# Altium PCB PCB1.PcbDoc (part 1 of 3)
Units mm, origin at the board's own origin, x right, y up, seen from the top; angles counter-clockwise.
Board outline 100.25 x 100.25 mm, 2 copper layers (Top Layer, Bottom Layer); 97 components, 80 nets, 311 pads, 309 vias.
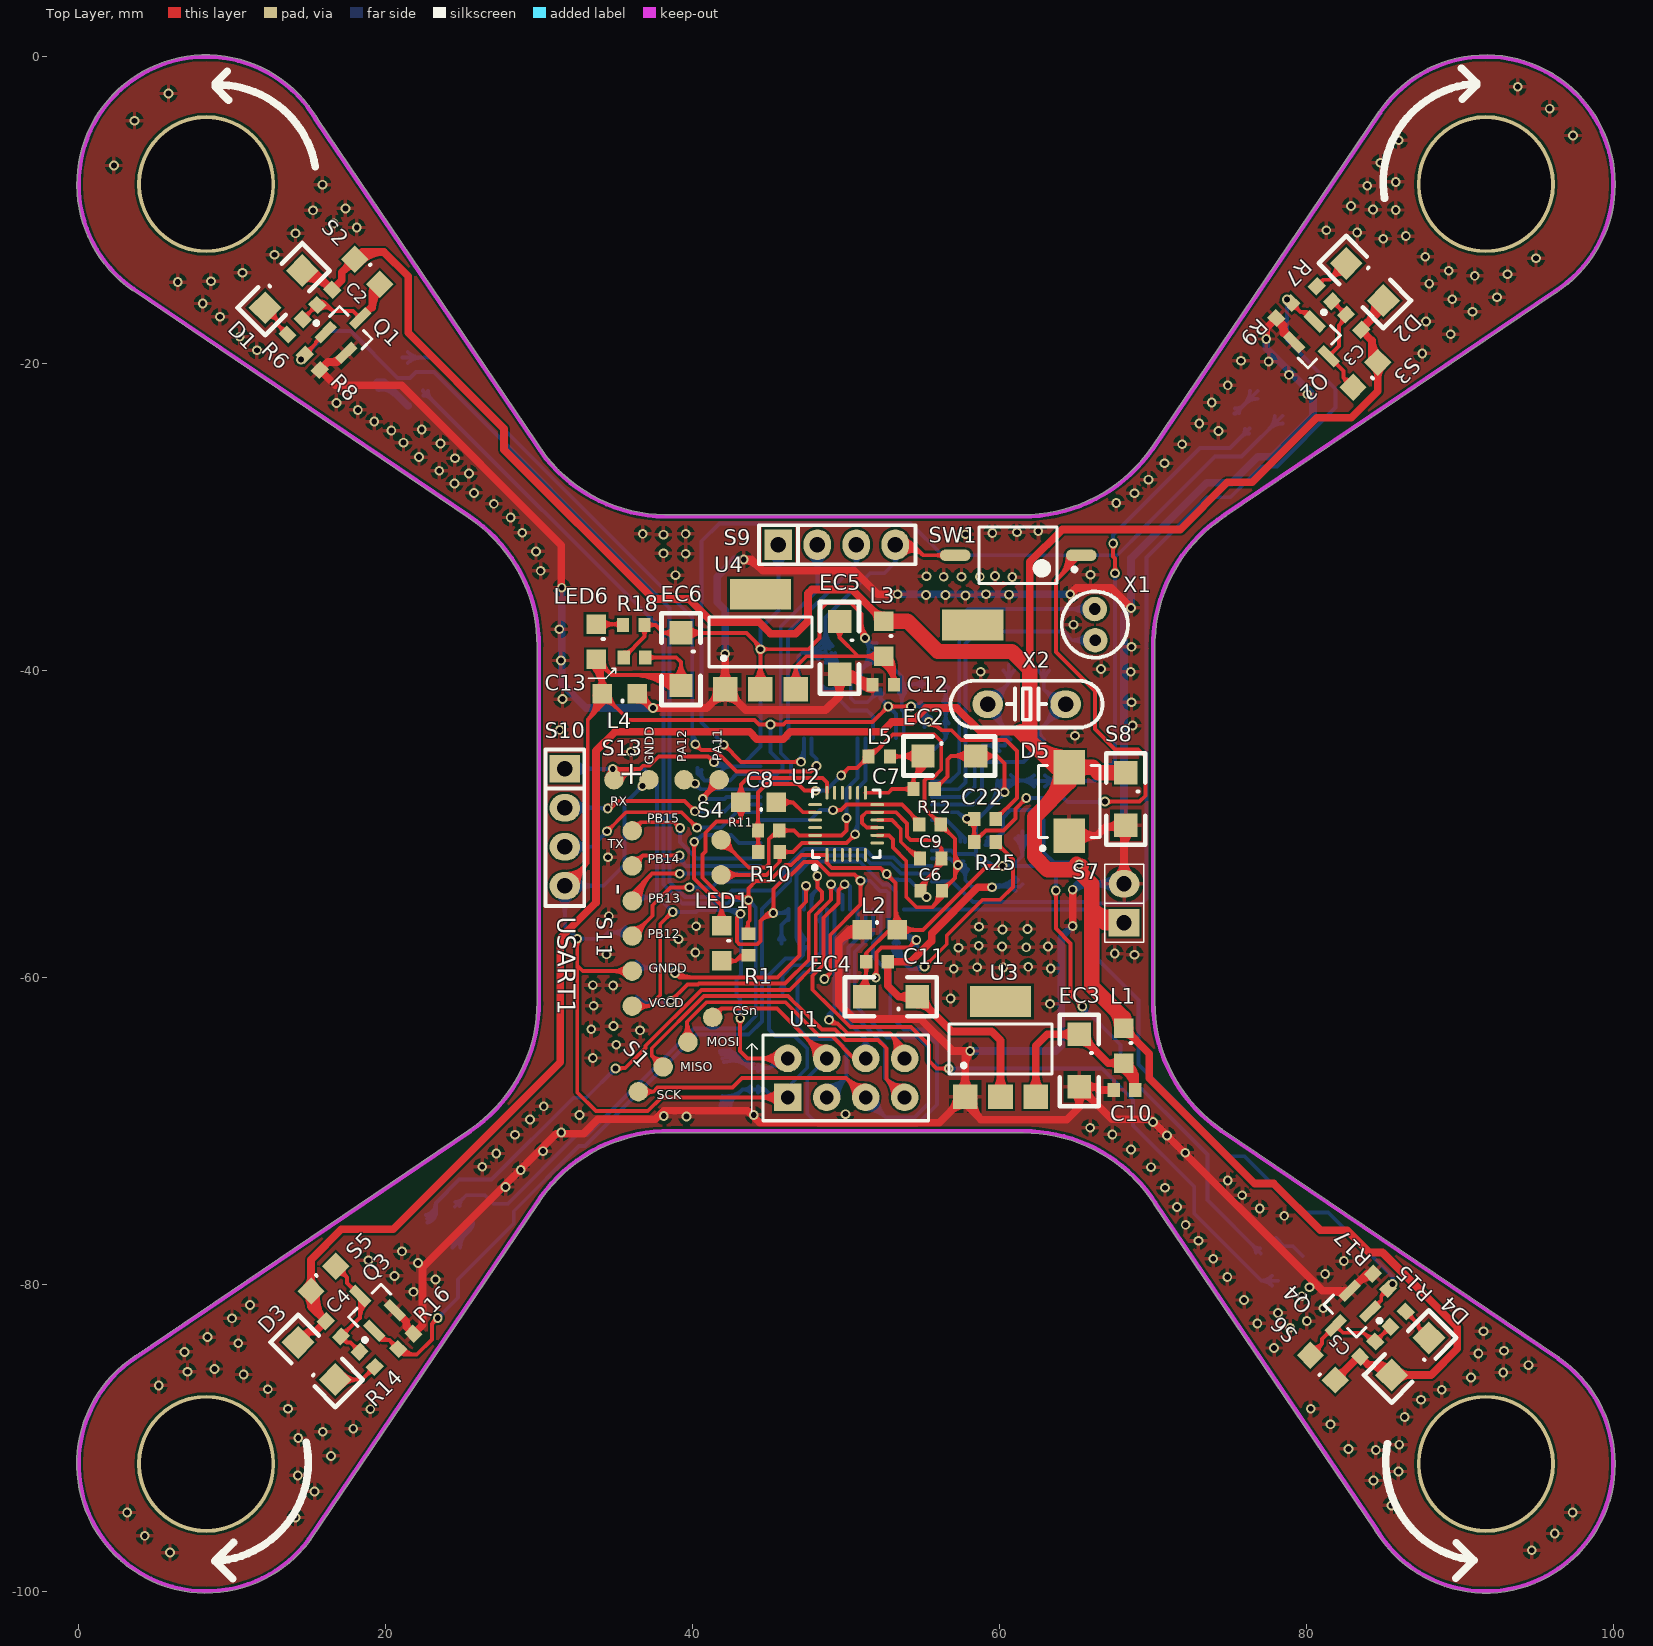
[diagram p0: Top Layer view]
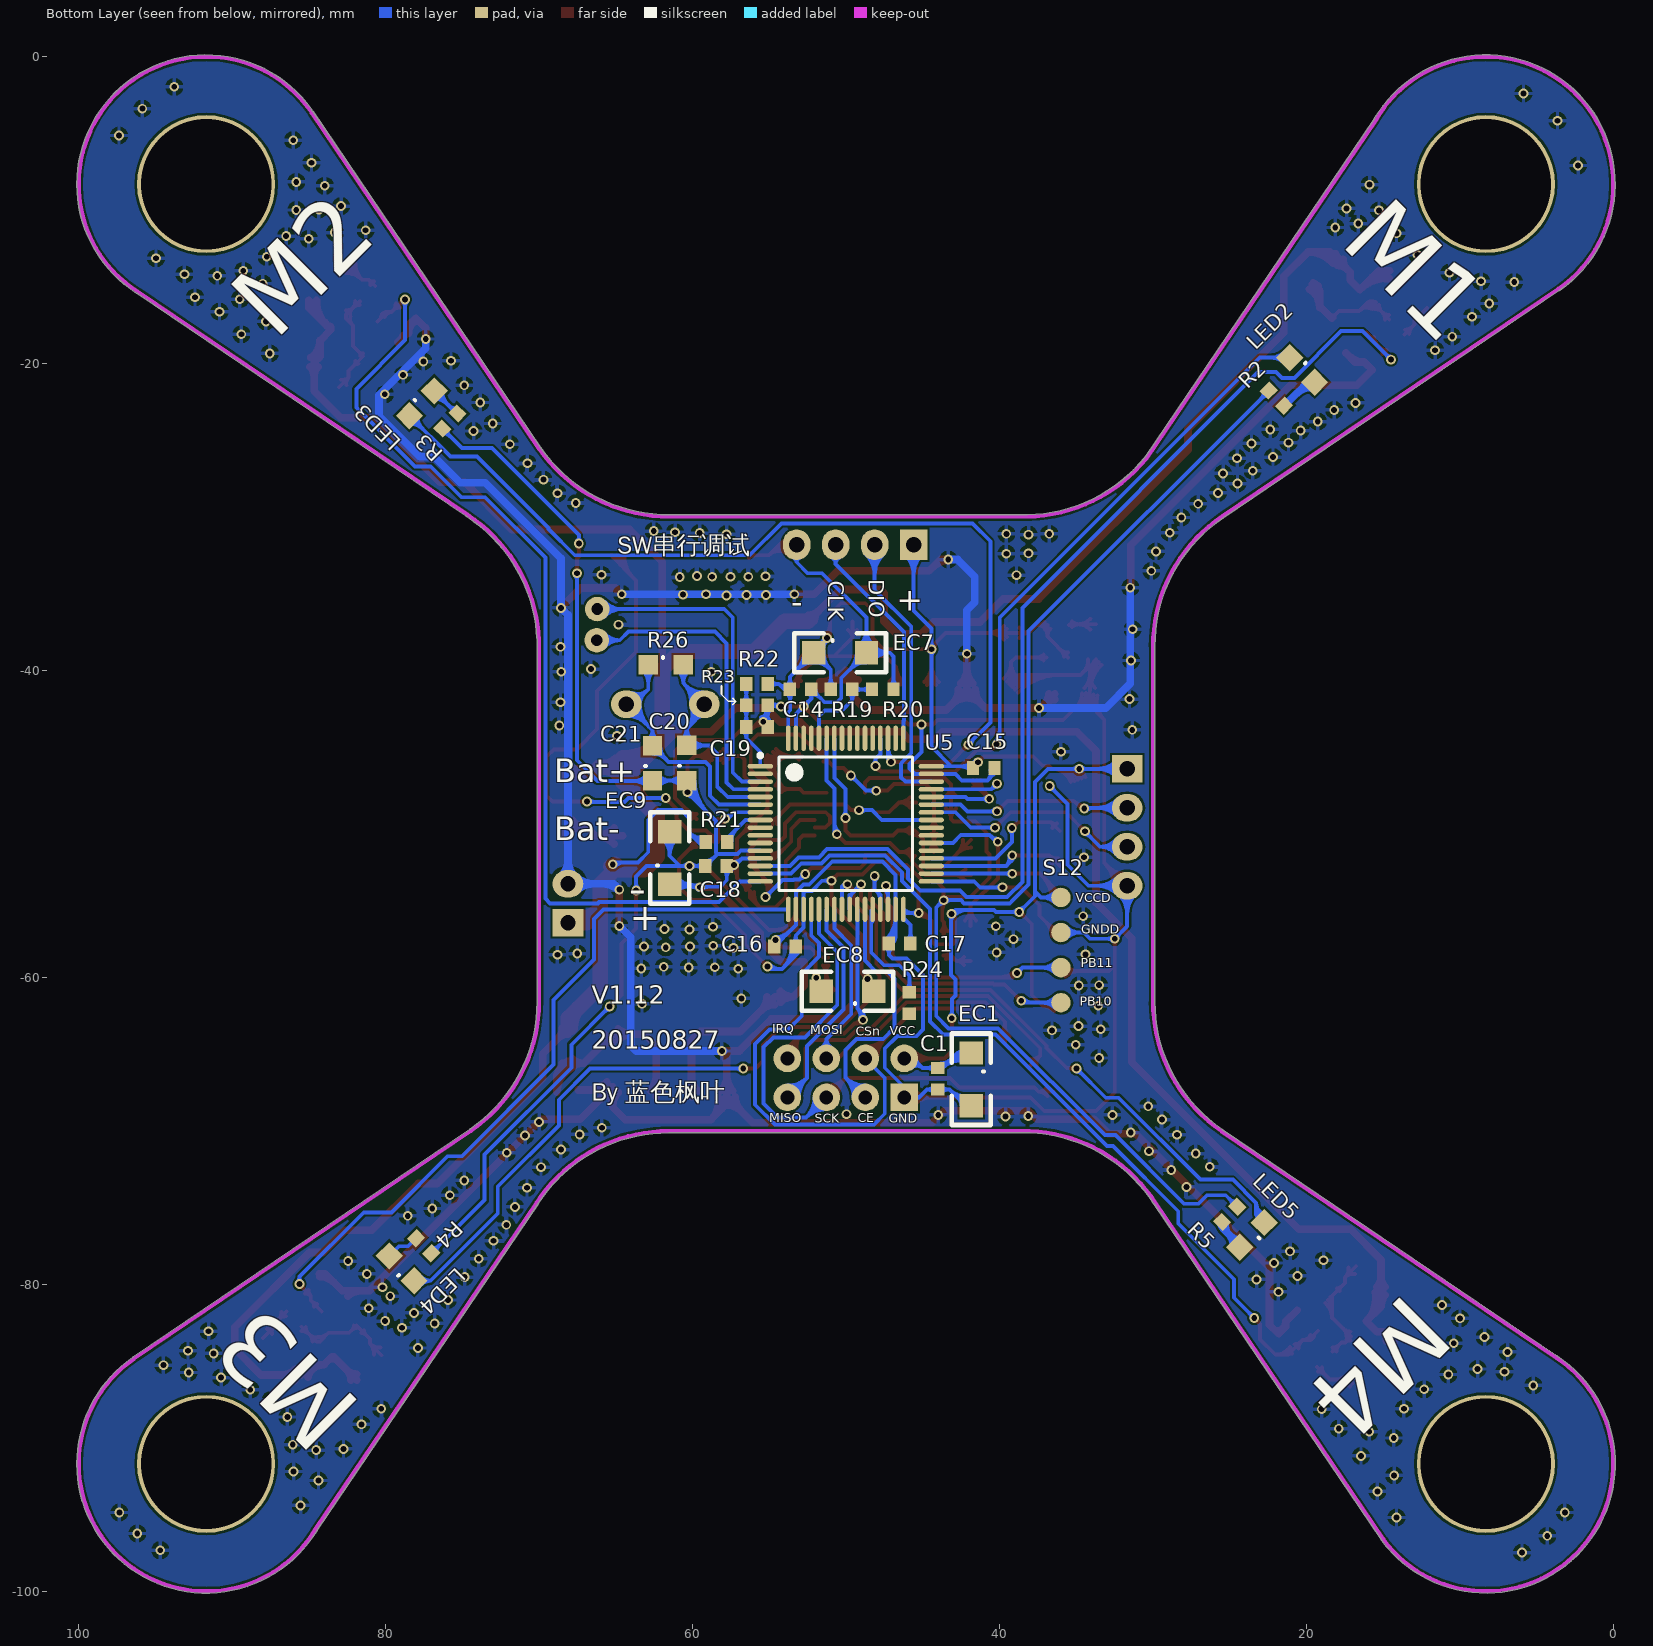
[diagram p1: Bottom Layer view, seen from below]

## Layer stack, top to bottom
Top Solder: solder mask 0.0102, Solder Resist, Dk 3.5
Top Layer: signal copper 0.0356
Dielectric1: dielectric 0.32, FR-4, Dk 4.8
Bottom Layer: signal copper 0.0356
Bottom Solder: solder mask 0.0102, Solder Resist, Dk 3.5

## Board outline
3.634,-84.682 ccw(c8.3,-91.7) 15.091,-96.69 ccw(c14.988,-96.615) 15.113,-96.641 29.915,-74.782 ccw(c29.833,-74.685) 29.94,-74.754 cw(c38.43,-80.223) 38.53,-70.124 ccw(c38.557,-70) 38.557,-70.127 61.519,-70.127 ccw(c61.544,-70.003) 61.545,-70.13 cw(c61.58,-80.229) 70.061,-74.747 ccw(c70.168,-74.678) 70.064,-74.751 84.458,-96 ccw(c84.581,-95.968) 84.472,-96.033 ccw(c91.7,-91.7) 100.127,-91.7 ccw(c91.7,-91.7) 96.501,-84.774 ccw(c96.391,-84.838) 96.463,-84.733 74.54,-69.915 ccw(c74.446,-70) 74.518,-69.895 cw(c80.227,-61.565) 70.128,-61.594 ccw(c70.001,-61.595) 70.127,-61.583 70.127,-38.613 ccw(c70.004,-38.582) 70.131,-38.582 ccw(c70.004,-38.582) 70.131,-38.581 cw(c80.229,-38.43) 74.733,-29.958 ccw(c74.663,-29.851) 74.762,-29.932 96.218,-15.413 ccw(c96.161,-15.299) 96.23,-15.407 ccw(c91.7,-8.3) 100.127,-8.3 ccw(c91.7,-8.3) 84.838,-3.408 ccw(c84.941,-3.482) 84.821,-3.524 ccw(c84.831,-3.651) 84.725,-3.58 69.937,-25.433 ccw(c69.991,-25.548) 69.886,-25.476 cw(c61.57,-19.746) 61.515,-29.845 ccw(c61.514,-29.972) 61.49,-29.847 38.775,-29.847 ccw(c38.747,-29.971) 38.743,-29.844 cw(c38.379,-19.752) 30.532,-26.108 ccw(c30.433,-26.188) 30.498,-26.079 15.573,-4.047 ccw(c15.454,-4.091) 15.564,-4.027 ccw(c8.3,-8.3) 3.484,-15.216 ccw(c3.557,-15.111) 3.52,-15.233 25.389,-30.033 ccw(c25.472,-29.937) 25.401,-30.043 cw(c19.777,-38.43) 29.876,-38.428 ccw(c30,-38.456) 29.873,-38.456 29.873,-61.519 ccw(c29.997,-61.544) 29.87,-61.545 cw(c19.771,-61.57) 29.87,-61.57 cw(c19.771,-61.57) 25.47,-69.907 ccw(c25.542,-70.012) 25.448,-69.926 3.656,-84.67 ccw(c3.704,-84.788)

## Design rules (kind name [scope] priority, off if disabled: settings)
Clearance [All] p1: gap=0.152
PolygonConnect [All] p1: connectstyle=Relief reliefconductorwidth=0.254 reliefentries=4 polygonreliefangle="90 Angle" airgapwidth=0.254
RoutingVias [All] p1: holewidth=0.711 width=1.27 viastyle="Through Hole" minholewidth=0.711 minwidth=1.27 maxholewidth=0.711 maxwidth=1.27
SilkToSolderMaskClearance SilkscreenOverComponentPads [IsPad] p1: minsilkscreentomaskgap=0.254 clearancetoexposedcopper=TRUE
SolderMaskExpansion [All] p1: expansion=0.102
Width Width_GND [InNet('GND')] p1: maxlimit=1 minlimit=0.5 preferedwidth=0.5 minimp=50.000000 maximp=50.000000 favimp=50.000000
Width Width_VCC [InNet('VCC' ,'BAT')] p2: maxlimit=1 minlimit=0.254 preferedwidth=0.5 minimp=50.000000 maximp=50.000000 favimp=50.000000
Width Width_ALL [All] p3: maxlimit=1 minlimit=0.254 preferedwidth=0.254 minimp=50.000000 maximp=50.000000 favimp=50.000000
28 further rules are at their usual default settings.

## Classes and differential pairs
component class Sheet1: C1 C2 C3 C4 C5 C6 C7 C8 C9 D1 D2 D3 D4 EC1 EC2 L5 LED1 LED2 LED3 LED4 LED5 Q1 Q2 Q3 Q4 R1 R2 R3 R4 R5 R6 R7 R8 R9 R10 R11 R12 R14 R15 R16 R17 S1 S2 S3 S4 S5 S6 U1 U2
component class Power: C10 C11 C12 C13 D5 EC3 EC4 EC5 EC6 L1 L2 L3 L4 LED6 R18 S7 S8 U3 U4
component class MUC: C14 C15 C16 C17 C18 C19 C20 C21 C22 EC7 EC8 EC9 R19 R20 R21 R22 R23 R24 R25 R26 S9 S10 S11 S12 S13 SW1 U5 X1 X2

## Components (designator, comment, footprint, x,y, rotation, side; value= is the part's Value field where it differs from the comment)
C1 "104" 0603 44.018,-66.599 r90 bottom
C2 "104" 0603 16.027,-15.672 r45 top
C3 "104" 0603 83.083,-17.297 r315 top
C4 "104" 0603 16.586,-82.906 r135 top
C5 "104" 0603 83.998,-84.226 r225 top
C6 "104" 0603 55.55,-54.356 r180 top
C7 "104" 0603 55.093,-47.727 r180 top
C8 "106" 0805 44.272,-48.565 r180 top
C9 "104" 0603 55.524,-52.248 r0 top
C10 "104" 0603 68.148,-67.335 r180 top
C11 "104" 0603 52.019,-58.979 r180 top
C12 "104" 0603 52.428,-40.92 r180 top
C13 "104" 0603 36.222,-39.142 r0 top
C14 "104" 0603 52.959,-41.224 r0 bottom
C15 "104" 0603 41.021,-46.355 r0 bottom
C16 "104" 0603 53.975,-57.988 r180 bottom
C17 "104" 0603 46.507,-57.785 r180 bottom
C18 "104" 0603 58.471,-52.73 r180 bottom
C19 "104" 0603 55.804,-43.688 r0 bottom
C20 "22pF" 0805 60.35,-45.999 r90 bottom
C21 "22pF" 0805 62.586,-46.025 r90 bottom
C22 "104" 0603 59.055,-49.682 r0 top
D1 "IN4148" 1206 12.141,-16.358 r45 top
D2 "IN4148" 1206 82.601,-13.462 r315 top
D3 "IN4148" 1206 16.713,-86.208 r135 top
D4 "IN4148" 1206 87.986,-83.49 r225 top
D5 "SMBJ5.0A" DIOM4436X23N 64.541,-48.539 r90 top
EC1 "10uF" 1206 41.834,-64.922 r270 bottom
EC2 "10uF" 1206 55.016,-45.568 r0 top
EC3 "22uf" 1206 65.202,-63.703 r270 top
EC4 "22uf" 1206 54.635,-61.265 r180 top
EC5 "22uf" 1206 49.581,-36.805 r270 top
EC6 "22uf" 1206 39.245,-37.541 r270 top
EC7 "10uF" 1206 52.095,-38.837 r180 bottom
EC8 "10uF" 1206 48.184,-60.909 r0 bottom
EC9 "10uF" 1206 61.493,-53.924 r90 bottom
L1 "BEAD" 0805 68.072,-64.465 r270 top
L2 "BEAD" 0805 52.222,-56.921 r0 top
L3 "BEAD" 0805 52.428,-37.948 r270 top
L4 "BEAD" 0805 35.232,-41.478 r180 top
L5 "BEAD" 0603 52.172,-45.593 r180 top
LED1 "LED" 0805 41.861,-57.809 r270 top
LED2 "LED" 0805 20.27,-20.448 r225 bottom
LED3 "LED" 0805 77.608,-22.586 r135 bottom
LED4 "LED" 0805 78.959,-78.923 r45 bottom
LED5 "LED" 0805 23.576,-76.783 r315 bottom
LED6 "LED" 0805 33.682,-38.151 r270 top
Q1 "MOSFET-N" SOT-23_N 17.551,-17.831 r45 top
Q2 "MOSFET-N" SOT-23_N 80.67,-18.72 r315 top
Q3 "AO3416" SOT-23_N 19.126,-81.559 r135 top
Q4 "MOSFET-N" SOT-23_N 82.702,-81.89 r225 top
R1 "470" 0603 43.637,-57.861 r90 top
R2 "470" 0603 21.946,-22.25 r45 bottom
R3 "470" 0603 75.813,-23.734 r315 bottom
R4 "470" 0603 77.524,-77.487 r225 bottom
R5 "470" 0603 24.994,-75.438 r135 bottom
R6 "1K" 0603 14.097,-17.602 r225 top
R7 "1K" 0603 81.178,-15.443 r135 top
R8 "20K" 0603 15.215,-19.914 r315 top
R9 "20K" 0603 78.537,-16.535 r225 top
R10 "3K" 0603 44.983,-51.816 r180 top
R11 "3K" 0603 44.958,-50.419 r180 top
R12 "3K" 0603 55.474,-50.038 r0 top
R14 "1K" 0603 18.796,-84.887 r315 top
R15 "1K" 0603 85.979,-82.271 r45 top
R16 "20K" 0603 21.311,-83.718 r45 top
R17 "20K" 0603 84.836,-79.807 r135 top
R18 "1K" 0603 36.172,-37.033 r180 top
R19 "0R" 0603 50.292,-41.224 r0 bottom
R20 "20K" 0603 47.6,-41.224 r180 bottom
R21 "20K" 0603 58.445,-51.181 r180 bottom
R22 "20K" 0603 55.804,-40.869 r180 bottom
R23 "20K" 0603 55.804,-42.266 r0 bottom
R24 "0R" 0603 45.872,-61.671 r90 bottom
R25 "10K" 0603 59.055,-51.181 r0 top
R26 "1M" 0805 61.722,-39.649 r180 bottom
S1 "TP" TP4 38.887,-65.024 r225 top
S2 "M1" 0805 18.796,-14.046 r315 top
S3 "M2" 0805 83.82,-20.726 r225 top
S4 "TP" TP2 41.834,-52.197 r270 top
S5 "M0" 0805 15.977,-79.629 r45 top
S6 "M3" 0805 81.077,-85.395 r135 top
S7 "CON2" SIP2 68.123,-56.439 r90 top
S8 "CON2" 1206 68.224,-46.66 r270 top
S9 "CON4" SIP4 45.593,-31.801 r0 top
S10 "CON4" SIP4 31.674,-46.406 r270 top
S11 "TP" TP6 36.068,-56.159 r270 top
S12 "TP" TP4 35.992,-58.217 r90 bottom
S13 "TP" TP4 38.303,-47.117 r180 top
SW1 "KEY2" SSOP2N 61.214,-32.487 r180 top
U1 "NRF24L01" CN8 46.203,-67.818 r90 top
U2 "MPU6050" QFN50P400X400X95_HS-25N 50.013,-49.987 r90 top
U3 "AMS1117" SOT223 60.069,-64.669 r0 top
U4 "AMS1117" SOT223 44.425,-38.127 r0 top
U5 "STM32F103RBT6" TSQFP50P1200X1200X160-64N 50.013,-49.987 r180 bottom
X1 "32.768KHz" XTAL-50-2 66.243,-38.024 r90 top
X2 "8MHz" XTAL-200 64.313,-42.189 r180 top

## Footprints (in the part's own frame and the unit in brackets; to place one, negate y for a bottom-side part, rotate by r counter-clockwise, add the part's x,y. Pads: shape width x height; smd on the part's side, far side on the other; paste and mask are expansions set on the pad)
0603 [mm] "Chip Inductor, Body 0.6x0.3mm, IPC High Density"
  rect 0.8x0.9 smd: 1(-0.7,0) 2(0.7,0)
  body extent -0.87,-0.48 0.87,0.48, height 1.3
0805 [mil] "Chip Resistor; Body 2.0 x 1.3 mm (LxW typ)"
  rect 50x50 smd: 1(-46,1) 2(44,1)
  silkscreen extent -8,18 -8,21
1206 [mil]
  rect 60x60 smd: 1(0,0) 2(135,0)
  silkscreen extent -50,-50 185,50
CN8 [mm] "CN?"
  rect 1.8x1.8 hole 0.9: 1(0,0)
  round 1.8 hole 0.9: 2(2.54,0) 3(0,-2.54) 4(2.54,-2.54) 5(0,-5.08) 6(2.54,-5.08) 7(0,-7.62) 8(2.54,-7.62)
  silkscreen extent -1.52,-9.17 4.06,2.68
DIOM4436X23N [mm] "Molded Diode, 2-Leads, Body 4.4x3.6mm, IPC Medium Density"
  rect 2.25x2.05 smd: 1(-2.233,0) 2(2.233,0)
  silkscreen extent -3.17,-2 2.35,2, body extent -2.35,-1.97 2.35,1.97, height 2.3
QFN50P400X400X95_HS-25N [mm] "QFN, 24-Leads, Body 4.00x4.00mm, Pitch 0.50mm, Thermal Pad 2.68x2.60mm, IPC Medium Density"
  oval 0.9x0.2 smd: 1(-2.025,1.25) 2(-2.025,0.75) 3(-2.025,0.25) 4(-2.025,-0.25) 5(-2.025,-0.75) 6(-2.025,-1.25) 13(2.025,-1.25) 14(2.025,-0.75) 15(2.025,-0.25) 16(2.025,0.25) 17(2.025,0.75) 18(2.025,1.25)
  oval 0.2x0.9 smd: 7(-1.25,-2.025) 8(-0.75,-2.025) 9(-0.25,-2.025) 10(0.25,-2.025) 11(0.75,-2.025) 12(1.25,-2.025) 19(1.25,2.025) 20(0.75,2.025) 21(0.25,2.025) 22(-0.25,2.025) 23(-0.75,2.025) 24(-1.25,2.025)
  silkscreen extent -2.97,-2.2 2.2,2.2, body extent -2.05,-2.05 2.05,2.05, height 0.95
SIP2 [mm]
  rect 1.8x2 hole 1: 1(0,0)
  oval 1.8x2 hole 1: 2(2.54,0)
  silkscreen extent -1.27,-1.27 3.81,1.27
SIP4 [mm]
  rect 1.8x2 hole 1: 1(0,0)
  oval 1.8x2 hole 1: 2(2.54,0) 3(5.08,0) 4(7.62,0)
  silkscreen extent -1.27,-1.27 8.94,1.27
SOT223 [mm] "SOT-223/SC-73; 4 Leads; Body 6.7 x 7.3 mm, inc. leads (LxW max)"
  rect 1.6x1.6 smd: 1(-2.3,-3.1) 2(0,-3.1) 3(2.3,-3.1)
  rect 4x2 smd: 4(0,3.1)
  silkscreen extent -3.35,-1.63 3.35,1.62
SOT-23_N [mm] "SOT23, 3-Leads, Body 2.9x1.3mm, Pitch 0.95mm, Lead Span 2.5mm, IPC Medium Density"
  rect 1.5x0.6 smd: 1(1.125,0) 2(-1.125,0.95) 3(-1.125,-0.95)
  silkscreen extent -1.25,-1.5 0.7,1.92, body extent -0.7,-1.5 0.7,1.5, height 1.1
SSOP2N [mm] "SSOP, 2-Leads, Body 3.7x6.1mm (max), Pitch 0.00mm, IPC Medium Density"
  oval 2x0.75 smd: 1(-4.115,0) 2(4.089,0)
  silkscreen extent -3.8,-1.85 2.55,1.85, body extent -3.05,-1.85 3.05,1.85, height 2.5
TP2 [mil] "Chip Resistor; Body 2.0 x 1.3 mm (LxW typ)"
  round 50 smd: 1(-46,1) 2(44,1)
TP4 [mil] "Chip Resistor; Body 2.0 x 1.3 mm (LxW typ)"
  round 50 smd: 1(-135,0) 2(-45,0) 3(45,0) 4(135,0)
TP6 [mil] "Chip Resistor; Body 2.0 x 1.3 mm (LxW typ)"
  round 50 smd: 1(-225,0) 2(-135,0) 3(-45,0) 4(45,0) 5(135,0) 6(225,0)
TSQFP50P1200X1200X160-64N [mm] "TSQFP, 64-Leads, Body 12.0x12.0mm (max), Pitch 0.50mm, IPC Medium Density"
  oval 1.65x0.3 smd: 1(-5.575,3.75) 2(-5.575,3.25) 3(-5.575,2.75) 4(-5.575,2.25) 5(-5.575,1.75) 6(-5.575,1.25) 7(-5.575,0.75) 8(-5.575,0.25) 9(-5.575,-0.25) 10(-5.575,-0.75) 11(-5.575,-1.25) 12(-5.575,-1.75) 13(-5.575,-2.25) 14(-5.575,-2.75) 15(-5.575,-3.25) 16(-5.575,-3.75) 33(5.575,-3.75) 34(5.575,-3.25) 35(5.575,-2.75) 36(5.575,-2.25) 37(5.575,-1.75) 38(5.575,-1.25) 39(5.575,-0.75) 40(5.575,-0.25) 41(5.575,0.25) 42(5.575,0.75) 43(5.575,1.25) 44(5.575,1.75) 45(5.575,2.25) 46(5.575,2.75) 47(5.575,3.25) 48(5.575,3.75)
  oval 0.3x1.65 smd: 17(-3.75,-5.575) 18(-3.25,-5.575) 19(-2.75,-5.575) 20(-2.25,-5.575) 21(-1.75,-5.575) 22(-1.25,-5.575) 23(-0.75,-5.575) 24(-0.25,-5.575) 25(0.25,-5.575) 26(0.75,-5.575) 27(1.25,-5.575) 28(1.75,-5.575) 29(2.25,-5.575) 30(2.75,-5.575) 31(3.25,-5.575) 32(3.75,-5.575) 49(3.75,5.575) 50(3.25,5.575) 51(2.75,5.575) 52(2.25,5.575) 53(1.75,5.575) 54(1.25,5.575) 55(0.75,5.575) 56(0.25,5.575) 57(-0.25,5.575) 58(-0.75,5.575) 59(-1.25,5.575) 60(-1.75,5.575) 61(-2.25,5.575) 62(-2.75,5.575) 63(-3.25,5.575) 64(-3.75,5.575)
  silkscreen extent -5.7,-4.35 4.35,4.57, body extent -5,-5 5,5, height 1.6
XTAL-50-2 [mm]
  round 1.6 hole 0.762: 1(0,0) 2(2.032,0.025)
  rect 2x4 smd: 3(0.991,7.976)
  silkscreen extent -1.14,-2.13 3.17,2.18
XTAL-200 [mm]
  oval 2x1.8 hole 1: 1(0,0) 2(5.08,0)
  silkscreen extent -2.41,-1.52 7.49,1.52

## Part data
C1 C2 C3 C4 C5 C6 C7 C8 C9 C10 C11 C12 C13 C14 C15 C16 C17 C18 C19 C20 C21 C22: library part CAP
D1 D2 D3 D4: library part DIODE
EC1 EC2 EC3 EC4 EC5 EC6 EC7 EC8 EC9: library part EC
L1 L2 L3 L4 L5: library part Inductor, "Inductor"
Q1 Q2 Q4: "N-Channel MOSFET"
Q3: library part MOSFET-N, "N-Channel MOSFET"
R1 R2 R3 R4 R5 R6 R7 R8 R9 R10 R11 R12 R14 R15 R16 R17 R18 R19 R20 R21 R22 R23 R24 R25 R26: library part RES
S1 S12 S13: library part CON4
S2 S3 S4 S5 S6: library part CON2
S11: library part CON6
X1 X2: library part XTAL

## Free pads (board coordinates)
  round 9 hole 8.5: 0(8.3,-91.7) 0(8.3,-8.3) 0(91.7,-91.7) 0(91.7,-8.3)

## Via types
v1: diameter 0.635, hole 0.381, Top Layer to Bottom Layer, 309 vias

## Nets (pads, with @x,y where several pads share a name; then routed paths per layer and width w, separated by ;. In a path a pad name is that pad's centre, name@x,y a point inside that pad or via, vN(x,y) a via of type N, cw(c..) or ccw(c..) an arc to the next point about the centre after c; other vN are vias at no path point)
AGND: R24.1
BAT: C2.2 C3.2 C4.2 C5.2 D1.2 D2.2 D3.2 D4.2 D5.2 L1.1 L3.1 R21.1 S2.1 S3.1 S5.1 S6.1 S7.1 S8.1 | length 326.4
  Top Layer w0.5: D3.2@14.289,-83.783 14.988,-83.083 ; D3.2@14.375,-83.278 ccw(c14.493,-82.589) 14.988,-83.083 ; D1.2@14.567,-13.945 cw(c14.656,-15.468) 15.735,-14.389 ; D1.2@14.566,-13.933 15.278,-13.933 C2.2@16.522,-15.177 ; D1.2@14.596,-14.444 cw(c14.743,-16.956) C2.2@16.522,-15.177 ; D3.2@14.793,-83.696 cw(c15.483,-83.578) 14.988,-83.083 ; S5.1@14.86,-80.709 cw(c14.203,-81.367) 15.132,-81.367 cw(c16.062,-81.367) S5.1@15.405,-80.709 ; S5.1@14.86,-80.165 ccw(c14.203,-79.508) 15.132,-79.508 ccw(c16.062,-79.508) S5.1@15.405,-80.165 ; S5.1@15.02,-80.415 ccw(c16.474,-80.698) 15.426,-81.746 ; S5.1@15.51,-80.511 ccw(c17.587,-80.915) C4.2@16.091,-82.411 ; S2.1@17.603,-13.202 cw(c16.673,-13.202) 17.331,-13.859 cw(c17.988,-14.517) S2.1@17.988,-13.587 ; S2.1@17.901,-13.126 cw(c18.785,-13.901) 18.785,-12.725 ; S2.1@18.084,-12.829 ccw(c18.183,-12.444) 18.464,-12.725 ; S2.1@18.277,-13.456 cw(c19.888,-14.867) 19.888,-12.725 ; S2.1@18.361,-13.106 cw(c18.746,-13.007) 18.464,-12.725 ; L3.1@52.068,-36.779 ccw(c51.139,-36.779) 51.796,-36.122 ccw(c52.453,-35.465) L3.1@52.453,-36.394 ; L3.1@52.453,-36.779 50.395,-34.722 47.777,-34.722 47.523,-34.976 47.523,-36.779 46.711,-37.592 45.085,-37.592 44.323,-36.83 41.25,-36.83 39.751,-35.331 37.44,-35.331 27.711,-25.603 27.711,-24.232 21.463,-17.983 21.463,-14.3 19.888,-12.725 ; 61.39,-43.993 58.776,-43.993 57.226,-42.443 55.194,-42.443 54.28,-43.358 52.984,-43.358 52.349,-43.993 46.38,-43.993 45.898,-44.475 44.196,-44.475 43.713,-43.993 34.95,-43.993 33.702,-45.241 33.702,-55.122 31.369,-57.455 31.369,-65.532 20.482,-76.419 17.104,-76.419 15.132,-78.39 S5.1@15.132,-80.437 15.132,-81.452 C4.2@16.091,-82.411 ; 61.976,-39.929 61.976,-32.918 64.084,-30.81 71.78,-30.81 74.854,-27.737 76.479,-27.737 80.682,-23.534 82.918,-23.534 84.664,-21.787 S3.1@84.664,-19.918 84.277,-19.531 84.277,-18.491 ; L1.1@68.097,-63.682 cw(c68.097,-64.611) 68.755,-63.954 cw(c69.412,-63.297) L1.1@68.482,-63.297 ; L1.1@68.097,-63.297 69.774,-64.973 69.774,-66.573 76.636,-73.435 77.88,-73.435 80.924,-76.479 82.652,-76.479 84.101,-77.929 84.964,-77.929 89.84,-82.804 89.84,-84.201 88.126,-85.914 D4.2@85.561,-85.914 84.889,-85.242 ; S6.1@81.885,-86.239 83.403,-84.721 C5.2@83.503,-84.721 84.024,-85.242 ; S6.1@81.885,-85.854 ccw(c81.885,-84.924) 82.542,-85.582 ccw(c83.199,-86.239) S6.1@82.27,-86.239 ; 83.161,-84.963 cw(c83.467,-85.269) C5.2@83.467,-84.836 ; C3.2@83.575,-17.612 ccw(c83.412,-17.005) 83.957,-17.319 ; C3.2@83.827,-17.544 ccw(c82.17,-15.887) D2.2@84.513,-15.887 ; S3.1@84.392,-20.19 cw(c83.735,-20.848) 84.664,-20.848 cw(c85.594,-20.848) S3.1@84.936,-20.19 ; 84.673,-85.242 cw(c84.673,-86.149) D4.2@85.549,-85.918 ; 84.681,-16.69 ccw(c83.877,-15.887) D2.2@85.013,-15.887 ; S3.1@84.875,-19.596 cw(c85.597,-18.491) 84.277,-18.491 ; D2.2@85.025,-15.887 85.025,-16.345 C3.2@83.578,-17.792 84.277,-18.491 ; D4.2@85.059,-85.811 ccw(c84.446,-85.685) 84.889,-85.242 ; D4.2@85.066,-86.045 ccw(c84.024,-86.32) 84.024,-85.242 ; D4.2@85.458,-85.413 cw(c85.332,-84.8) 84.889,-85.242 ; D4.2@85.923,-86.277 cw(c86.797,-87.151) 86.797,-85.914 cw(c86.797,-84.678) D4.2@85.923,-85.552 ; 14.988,-83.083 15.418,-83.083 C4.2@16.091,-82.411 ; C2.2@16.522,-15.177 17.145,-14.554 17.145,-14.045 S2.1@17.988,-13.202 18.464,-12.725 ; 18.464,-12.725 19.888,-12.725 ; 84.024,-85.242 84.889,-85.242
  Top Layer w1: L3.1@52.453,-36.779 54.001,-36.779 55.982,-38.76 60.808,-38.76 61.976,-39.929 61.976,-44.579 ; 61.39,-43.993 61.976,-44.579 ; 62.044,-44.647 ccw(c64.541,-42.149) D5.2@64.541,-45.681 ; 63.035,-48.776 ccw(c60.665,-46.406) D5.2@64.016,-46.406 ; 64.784,-52.984 ccw(c64.784,-52.211) v1@65.331,-52.758 ; D5.2@64.913,-46.678 cw(c65.809,-47.574) 65.809,-46.306 cw(c65.809,-45.039) D5.2@64.913,-45.935 ; v1@65.019,-52.629 ccw(c65.744,-52.629) 65.232,-53.141 ; 67.4,-61.939 cw(c66.042,-63.297) L1.1@67.962,-63.297 ; S7.1@67.74,-56.722 ccw(c67.057,-57.404) 67.057,-56.439 ccw(c67.057,-55.473) S7.1@67.74,-56.156 ; S7.1@67.917,-56.053 cw(c67.398,-54.166) 66.015,-55.55 ; L1.1@68.097,-63.297 68.097,-62.636 66.015,-60.554 66.015,-55.55 ; S7.1@68.123,-56.439 66.904,-56.439 66.015,-55.55 ; S8.1@68.224,-46.66 66.446,-46.66 66.093,-46.306 D5.2@64.541,-46.306 ; 61.976,-44.579 63.703,-46.306 D5.2@64.541,-46.306 ; D5.2@64.541,-46.306 64.541,-47.269 62.281,-49.53 62.281,-52.121 63.144,-52.984 65.075,-52.984 66.015,-53.924 66.015,-55.55
  Bottom Layer w0.254: R21.1@59.093,-51.36 ccw(c59.208,-50.857) 59.573,-51.222 ; R21.1@59.145,-51.181 59.614,-51.181 ; R21.1@59.15,-51.112 ccw(c59.328,-50.327) 59.898,-50.897 ; R21.1@59.206,-50.865 ccw(c59.449,-49.797) 60.223,-50.571 ; R21.1@59.383,-51.316 cw(c59.614,-51.446) 59.614,-51.181 ; R21.1@59.383,-51.046 ccw(c59.614,-50.916) 59.614,-51.181 ; 64.466,-52.514 cw(c64.466,-53.365) v1@65.067,-52.764 ; v1(65.202,-52.629) 65.087,-52.514 63.563,-52.514 62.89,-51.841 62.89,-49.733 62.255,-49.098 60.731,-49.098 60.223,-49.606 60.223,-50.571 ; 59.614,-51.181 60.223,-50.571
BOOT0: R19.1 R20.1 U5.60 | length 9.1
  Bottom Layer w0.254: R20.1@48.3,-41.224 R19.1@49.592,-41.224 49.592,-41.921 ; R20.1@48.493,-41.417 cw(c48.959,-41.883) 48.959,-41.224 cw(c48.959,-40.565) R20.1@48.493,-41.031 ; R19.1@49.399,-41.417 ccw(c48.933,-41.883) 48.933,-41.224 ccw(c48.933,-40.565) R19.1@49.399,-41.031 ; R19.1@49.402,-41.47 cw(c48.962,-41.921) 49.592,-41.921 ; R19.1@49.782,-41.47 ccw(c50.222,-41.921) 49.592,-41.921 ; U5.60@51.763,-44.412 51.763,-42.974 51.384,-42.596 50.267,-42.596 49.592,-41.921
BOOT1: R24.2 U5.28 | length 9.2
  Bottom Layer w0.254: R24.2@45.679,-60.778 ccw(c45.213,-60.312) 45.872,-60.312 ccw(c46.531,-60.312) R24.2@46.065,-60.778 ; R24.2@45.872,-60.971 45.872,-59.868 46.533,-59.207 47.523,-59.207 48.356,-58.375 48.356,-56.438 ; U5.28@48.246,-56.253 cw(c47.981,-56.519) 48.356,-56.519 ; U5.28@48.263,-55.562 48.333,-55.633 48.333,-56.415 ; U5.28@48.285,-56.243 ccw(c48.462,-56.286) 48.333,-56.415 ; U5.28@48.285,-56.24 ccw(c48.53,-56.264) 48.356,-56.438 ; 48.333,-56.429 ccw(c48.114,-56.429) 48.248,-56.255 cw(c48.11,-56.459) 48.356,-56.459 ; 48.333,-56.415 48.356,-56.438
CE: U1.3 U5.27 | length 21.1
  Bottom Layer w0.254: U1.3@48.743,-67.818 50.038,-66.523 ; U1.3@48.749,-67.299 ccw(c48.765,-66.101) 49.612,-66.948 ccw(c50.459,-67.795) U1.3@49.262,-67.811 ; U1.3@48.753,-67.045 ccw(c48.776,-65.261) 50.038,-66.523 ; U5.27@48.763,-55.562 48.763,-58.908 48.006,-59.665 47.269,-59.665 46.838,-60.096 46.838,-63.271 47.574,-64.008 49.327,-64.008 50.038,-64.719 50.038,-66.523 ; U1.3@49.516,-67.808 cw(c51.299,-67.784) 50.038,-66.523
GND: C10.2 C12.2 D5.1 EC3.2 EC5.2 L2.1 L4.1 Q1.3 Q2.3 Q3.3 Q4.3 R8.2 R9.2 R16.2 R17.2 S7.2 S8.2 U3.1 U4.1 | length 327.1
  Top Layer w0.5: 16.332,-19.888 ccw(c16.332,-18.839) Q1.3@17.074,-19.581 ; Q1.3@17.428,-19.298 16.837,-19.888 16.23,-19.888 R8.2@15.71,-20.409 16.713,-21.412 21.031,-21.412 31.445,-31.826 v1@31.445,-34.671 ; Q3.3@20.593,-81.683 21.336,-82.426 ; R16.2@21.809,-83.043 cw(c21.976,-82.426) 21.336,-82.426 ; L4.1@36.4,-41.889 cw(c36.4,-42.818) 37.057,-42.161 cw(c37.715,-41.504) L4.1@36.785,-41.504 ; L4.1@36.4,-41.504 37.34,-42.443 v1(37.414,-42.443) 40.908,-42.443 U4.1@42.125,-41.227 ; U4.1@41.575,-41.227 cw(c40.247,-41.227) 41.186,-42.166 cw(c42.125,-43.104) 42.125,-41.777 cw(c42.125,-43.104) 43.064,-42.166 cw(c44.002,-41.227) U4.1@42.675,-41.227 ; U4.1@41.736,-40.838 ccw(c40.797,-39.899) 42.125,-39.899 ccw(c43.452,-39.899) U4.1@42.514,-40.838 ; v1(42.125,-38.901) U4.1@42.125,-41.227 ; v1@43.332,-32.834 cw(c43.332,-34.223) 44.315,-33.24 ; v1(43.332,-32.766) 43.84,-32.766 44.577,-33.503 50.546,-33.503 52.07,-35.027 v1(53.365,-35.027) ; EC5.2@49.219,-40.596 cw(c48.345,-41.47) 49.581,-41.47 cw(c50.817,-41.47) EC5.2@49.943,-40.596 ; EC5.2@49.586,-40.244 cw(c49.972,-41.053) 50.605,-40.419 ; EC5.2@49.801,-40.696 cw(c50.295,-41.73) 51.105,-40.92 ; EC5.2@50.036,-40.467 cw(c50.419,-40.664) 50.419,-40.234 ; EC5.2@50.036,-40 ccw(c50.419,-39.804) 50.419,-40.234 ; 50.112,-57.025 cw(c50.797,-57.71) L2.1@51.089,-56.786 ; L2.1@50.756,-57.14 ccw(c50.241,-57.561) 50.241,-56.896 ; L2.1@50.756,-56.652 cw(c50.241,-56.231) 50.241,-56.896 ; L2.1@50.938,-57.263 ccw(c50.517,-58.594) 49.53,-57.607 ; L2.1@51.054,-56.896 50.241,-56.896 ; 51.196,-41.011 ccw(c51.703,-40.504) C12.2@51.752,-41.219 ; C12.2@51.717,-40.72 cw(c51.603,-39.05) 50.419,-40.234 ; C12.2@51.728,-40.92 51.105,-40.92 ; U3.1@57.219,-67.769 cw(c55.891,-67.769) 56.83,-68.708 cw(c57.769,-69.647) U3.1@57.769,-68.319 ; U3.1@57.38,-67.38 ccw(c56.441,-66.442) 57.769,-66.442 ccw(c59.097,-66.442) U3.1@58.158,-67.38 ; 57.769,-65.733 cw(c59.027,-65.733) v1@58.138,-64.843 ; 57.769,-65.249 cw(c58.161,-65.249) v1@58.1,-64.862 ; U3.1@57.819,-67.776 ccw(c58.734,-67.894) U3.1@58.081,-68.546 ; U3.1@58.315,-67.84 ccw(c60.009,-68.058) 58.801,-69.266 ; D5.1@64.541,-50.772 66.347,-50.772 ; v1(64.618,-35.027) 65.024,-34.62 67.285,-34.62 v1(68.58,-35.916) ; v1(64.77,-56.642) v1(64.77,-54.28) ; EC3.2@64.84,-67.494 cw(c63.966,-68.368) 65.202,-68.368 cw(c66.438,-68.368) EC3.2@65.564,-67.494 ; D5.1@65.103,-51.306 cw(c66.347,-52.488) 66.347,-50.772 ; D5.1@65.103,-50.239 ccw(c66.347,-49.057) 66.347,-50.772 ; EC3.2@65.202,-67.644 cw(c65.202,-68.88) 66.076,-68.006 cw(c66.95,-67.132) EC3.2@65.714,-67.132 ; EC3.2@65.595,-67.46 cw(c66.294,-68.041) 66.294,-67.132 ; EC3.2@65.595,-66.805 ccw(c66.294,-66.223) 66.294,-67.132 ; 67.234,-50.19 cw(c67.234,-51.08) 67.862,-50.451 cw(c67.234,-51.08) 68.123,-51.08 ; C10.2@67.448,-67.335 66.497,-67.335 66.294,-67.132 ; S7.2@67.663,-53.439 ccw(c66.554,-52.33) 68.123,-52.33 ccw(c69.692,-52.33) S7.2@68.582,-53.439 ; S8.2@67.828,-49.764 cw(c66.929,-49.028) 66.929,-50.19 ; S7.2@68.123,-53.899 68.123,-50.19 66.929,-50.19 ; 68.123,-51.57 cw(c69.706,-51.57) S8.2@68.586,-50.451 ; v1(77.394,-18.39) 77.394,-17.678 R9.2@78.042,-17.03 78.511,-17.5 ; R9.2@78.01,-17.2 cw(c77.606,-18.01) 78.511,-18.01 ; R9.2@78.07,-17.216 cw(c78.047,-17.68) 78.511,-17.68 ; Q2.3@78.912,-18.236 cw(c79.387,-17.5) 78.511,-17.5 ; Q2.3@79.203,-18.596 78.511,-17.904 78.511,-17.5 ; 81.619,-80.422 cw(c81.619,-81.629) Q4.3@82.473,-80.776 ; 83.359,-79.889 cw(c84.306,-80.835) R17.2@84.306,-79.497 ; R17.2@84.341,-79.312 83.937,-79.312 Q4.3@82.826,-80.422 81.057,-80.422 69.875,-69.24 67.31,-69.24 EC3.2@65.202,-67.132 ; 21.336,-82.426 21.336,-82.754 R16.2@21.806,-83.223 22.403,-82.626 22.403,-78.892 31.115,-70.18 32.893,-70.18 33.833,-69.24 37.567,-69.24 38.125,-68.682 43.586,-68.682 44.375,-69.471 56.068,-69.471 U3.1@57.769,-67.769 ; U4.1@42.125,-41.227 43.468,-42.57 48.666,-42.57 49.581,-41.656 EC5.2@49.581,-40.234 50.419,-40.234 ; 49.53,-57.607 49.53,-61.722 50.521,-62.713 54.864,-62.713 56.947,-64.795 v1(58.09,-64.795) 57.769,-65.116 U3.1@57.769,-67.769 ; 49.53,-57.607 50.241,-56.896 ; 50.419,-40.234 51.105,-40.92 ; U3.1@57.769,-67.769 57.769,-68.234 58.801,-69.266 ; 58.801,-69.266 64.389,-69.266 65.202,-68.453 EC3.2@65.202,-67.132 ; EC3.2@65.202,-67.132 66.294,-67.132 ; 66.347,-50.772 66.929,-50.19
  Bottom Layer w0.5: v1(31.471,-34.595) 31.471,-40.843 33.071,-42.443 v1(37.414,-42.443) ; v1(42.125,-38.901) 42.125,-36.068 41.605,-35.549 41.605,-33.884 42.723,-32.766 v1(43.332,-32.766) ; v1@53.289,-35.027 v1(64.618,-35.027) ; v1@57.988,-64.795 v1(58.09,-64.795) 63.678,-64.795 64.033,-64.44 64.033,-57.379 v1(64.77,-56.642) ; v1(64.77,-54.28) 65.151,-53.899 S7.2@68.123,-53.899 68.123,-36.373 v1(68.58,-35.916) 68.58,-32.69 73.508,-27.762 75.133,-27.762 76.835,-26.06 77.775,-26.06 80.442,-23.393 80.442,-22.047 77.394,-18.999 v1@77.394,-18.339 ; v1@64.818,-54.328 cw(c65.853,-55.363) 65.853,-53.899 ; S7.2@67.563,-54.358 ccw(c66.454,-55.468) 66.454,-53.899 ccw(c66.454,-52.33) S7.2@67.563,-53.439 ; S7.2@67.663,-53.439 ccw(c66.554,-52.33) 68.123,-52.33 ccw(c69.692,-52.33) S7.2@68.582,-53.439
  other v1: 5.944,-97.485 94.691,-97.333 4.293,-96.393 96.19,-96.241 14.122,-95.199 3.15,-94.869 97.358,-94.869 85.547,-94.412 15.367,-93.497 84.379,-92.786 14.275,-92.456 86.004,-92.202 16.434,-91.186 84.531,-90.805 82.753,-90.729 86.055,-90.449 14.3,-90.018 15.9,-89.611 17.882,-89.408 81.585,-89.129 86.411,-88.646 18.999,-88.138 13.64,-88.113 80.289,-88.113 80.289,-88.113 87.478,-87.528 88.824,-86.868 12.319,-86.843 5.207,-86.589 90.729,-86.081 10.744,-85.877 92.837,-85.75 7.087,-85.7 8.839,-85.522 94.488,-85.268 91.211,-84.506 6.883,-84.404 92.888,-84.328 77.902,-84.15 10.389,-83.845 8.382,-83.439 91.542,-83.058 78.943,-82.829 76.81,-82.55 80.035,-82.398 9.982,-82.22 78.156,-81.864 81.102,-81.559 11.151,-81.356 75.946,-81.026 79.705,-80.772 21.819,-80.493 80.213,-80.188 23.241,-79.68 74.854,-79.527 20.574,-79.451 81.229,-79.324 22.098,-78.613 82.448,-78.486 18.872,-78.435 73.939,-78.334 21.057,-77.851 72.974,-77.165 72.136,-76.124 78.562,-75.54 76.962,-75.057 71.577,-74.955 75.819,-74.193 70.79,-73.711 27.813,-73.66 74.879,-73.228 28.804,-72.542 69.875,-72.365 26.289,-72.339 27.203,-71.476 72.111,-71.425 30.251,-71.323 68.58,-71.222 70.917,-70.307 28.423,-70.256 67.361,-70.231 31.445,-70.104 65.913,-69.799 70.002,-69.418 29.413,-69.266 39.599,-69.063 38.125,-69.037 32.639,-68.961 43.993,-68.961 49.962,-68.91 30.302,-68.402 33.503,-65.253 35.027,-64.389 36.576,-63.449 33.401,-63.373 34.849,-63.17 33.553,-61.849 63.297,-61.722 56.82,-61.366 34.823,-60.528 33.503,-60.503 57.023,-59.436 63.348,-59.411 60.249,-59.36 58.547,-59.334 61.874,-59.309 68.809,-58.522 34.392,-58.496 67.513,-58.445 40.183,-58.369 57.328,-58.064 61.747,-58.039 60.173,-57.988 63.17,-57.988 58.649,-57.937 39.091,-57.506 60.198,-56.871 61.824,-56.845 58.674,-56.693 40.234,-56.667 34.544,-56.007 34.493,-52.172 35.992,-45.288 64.922,-44.247 31.344,-43.866 68.682,-43.586 68.605,-42.062 31.521,-41.859 58.776,-40.081 68.555,-40.081 66.624,-39.903 31.42,-39.345 68.605,-38.456 31.318,-37.313 64.821,-37.008 57.785,-35.103 55.22,-35.077 56.49,-35.077 60.63,-35.052 59.131,-35.027 60.833,-33.909 56.363,-33.884 57.531,-33.884 58.725,-33.884 55.245,-33.858 59.715,-33.833 38.887,-33.782 65.938,-33.757 30.099,-33.503 39.548,-32.385 38.1,-32.36 29.794,-32.233 38.1,-31.14 57.785,-31.115 36.754,-31.09 39.548,-31.09 59.538,-31.039 28.905,-31.013 61.138,-30.988 62.535,-30.912 28.143,-30.023 27.051,-29.134 67.615,-29.083 68.809,-28.448 25.756,-28.423 24.486,-27.813 69.723,-27.559 25.425,-27.153 23.495,-26.975 70.764,-26.492 24.511,-26.162 22.174,-26.086 71.907,-25.248 23.571,-25.197 21.158,-25.146 74.27,-24.384 20.371,-24.359 22.352,-24.282 73.025,-23.901 19.253,-23.774 18.186,-23.012 16.789,-22.555 73.838,-22.53 80.061,-21.996 74.879,-21.412 78.867,-20.726 77.546,-19.863 75.743,-19.812 87.554,-19.329 11.608,-19.126 10.49,-18.237 89.408,-18.085 87.808,-17.247 9.195,-16.942 90.83,-16.612 8.077,-16.078 89.51,-15.799 92.431,-15.672 88.011,-14.783 6.452,-14.681 8.611,-14.63 90.983,-14.275 93.116,-14.173 10.668,-14.072 89.281,-13.945 94.971,-13.132 87.757,-13.03 12.751,-12.903 85.014,-11.862 86.487,-11.684 14.122,-11.506 83.312,-11.455 81.305,-11.303 18.11,-11.125 16.612,-10.871 15.265,-10.008 85.827,-9.982 84.353,-9.957 17.374,-9.881 82.906,-9.728 83.972,-8.407 15.875,-8.331 85.827,-8.153 2.286,-7.087 84.836,-6.909 86.03,-5.436 97.384,-5.131 3.632,-4.166 95.86,-3.378 5.842,-2.388 93.777,-1.956